# EAGLE board RFM-XXXXS Module (EAGLE 6.3)
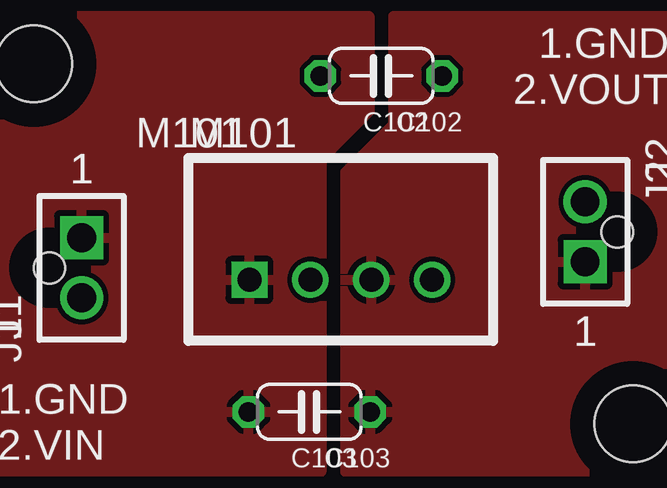
[diagram p0: board, top side]
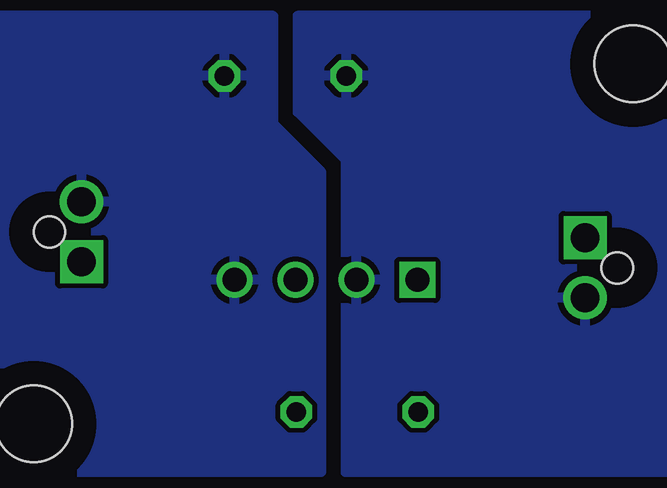
[diagram p1: board, bottom side, seen from below]

No outline drawn. Coordinates in mm, seen from the top.
Copper layers (1*2*3*4*5*16): Top 0.035mm / dielectric 0.28mm / Route2 0.035mm / dielectric 0.28mm / Route3 0.035mm / dielectric 0.28mm / Route4 0.035mm / dielectric 0.28mm / Route5 0.035mm / dielectric 0.28mm / Bottom 0.035mm
Design rules "default *": minimum track width 10mil, minimum drill 24mil, track to track 8mil, track to pad 8mil, pad to pad 8mil, via to via 8mil, smd to smd 8mil, copper to edge 40mil, drill to drill 8mil, minimum pad ring 10mil, minimum via ring 8mil, stop-mask expansion 4mil, vias tented up to drill 20mil, thermal gap 10mil
Holes 3.2 mm at 3,18 28,3

## Footprints (pad centres in the part's own frame; a part is rotated, then mirrored left to right if it is on the bottom)
C050-024X044 = drill 0.813 octagon: 1 -2.54,0; 2 2.54,0
PINS_2-NANOFIT = drill 1.2 square: 1 -1.25,0 | drill 1.2: 2 1.25,0 | hole 1.3: 0,-1.34
RFM-XXXXS = drill 1 square: 1 0,0 | drill 1: 2 2.54,0; 3 5.08,0; 4 7.62,0

## Placement (x,y rotation side)
C102  1n 2kV  [C050-024X044]  17.5,17.5 180 top
C103  1n 2kV  [C050-024X044]  14.5,3.5 180 top
J1  PINS_2-NANOFIT-105309-1102  [PINS_2-NANOFIT]  5,9.5 270 top
J2  PINS_2-NANOFIT-105309-1102  [PINS_2-NANOFIT]  26,11 90 top
M101  RFM0505S  [RFM-XXXXS]  12,9 0 top

## Library data of the parts
C102 C103 J1 J2 M101 = nolan-utsa

## Nets
0VIN: C103.2 J1.1 M101.1
5V: C102.1 J2.2 M101.4
GND: C103.1 J2.1 M101.3
VIN: C102.2 J1.2 M101.2

## Tracks (layer width: path | path; a pad name or v marks a point on that pad's centre or on a via)
0VIN
  pour Top: 1,20 17,20 17,16 15,14 15,1 1,1
5V
  pour Bottom: 18,20 30,20 30,1 16,1 16,13.5 18,15.5
GND
  pour Top: 18,20 30,20 30,1 16,1 16,13.5 18,15.5
VIN
  pour Bottom: 1,20 17,20 17,16 15,14 15,1 1,1

## Text on the board
tPlace: 1.GND / 2.VOUT | 1 | 1 | 1.GND / 2.VIN
_tNames: C102 | M101 | J2 | J1 | C103